# EAGLE board power (EAGLE 9.6.2)
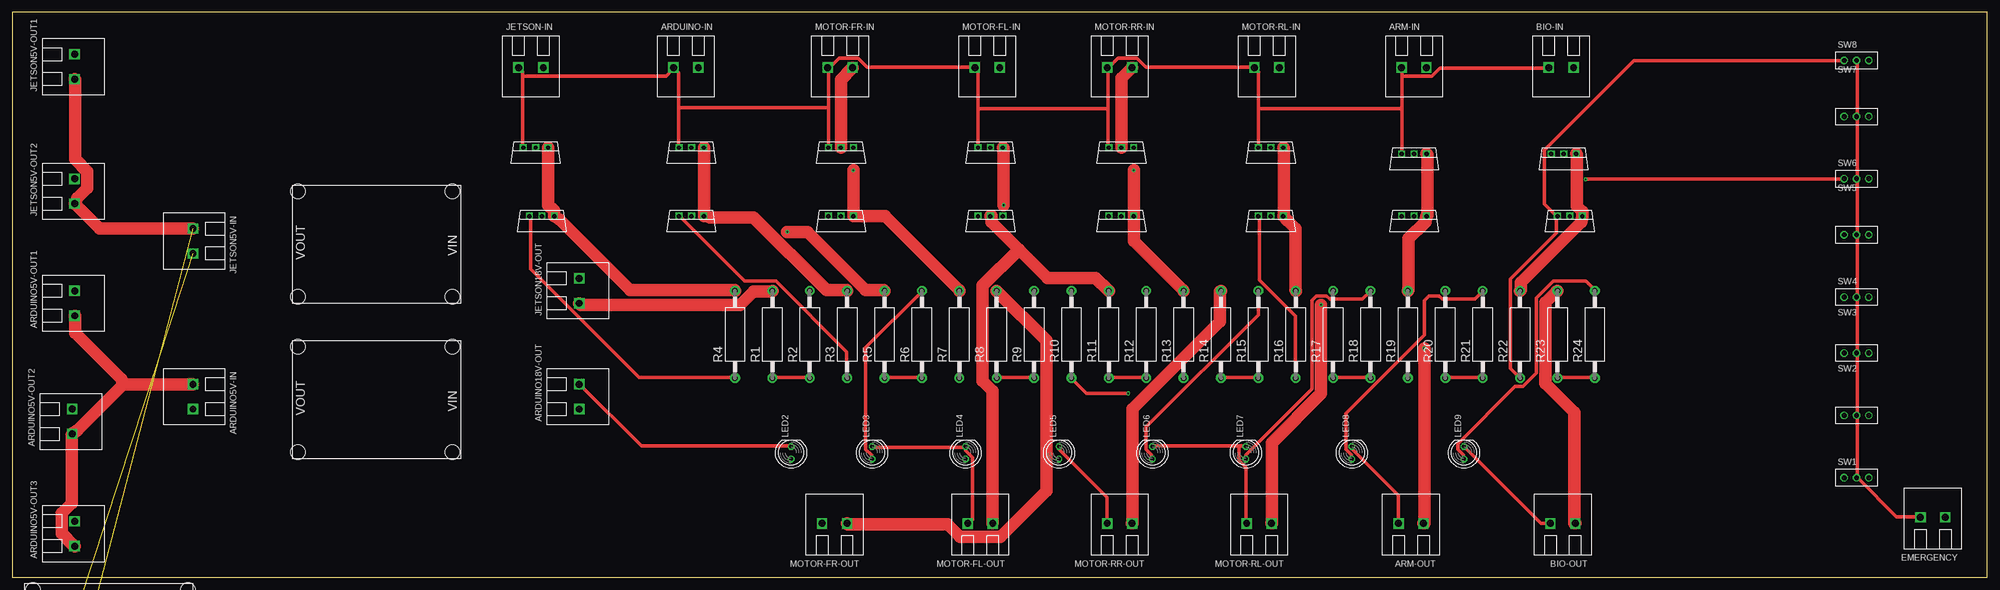
[diagram p0: board, top side]
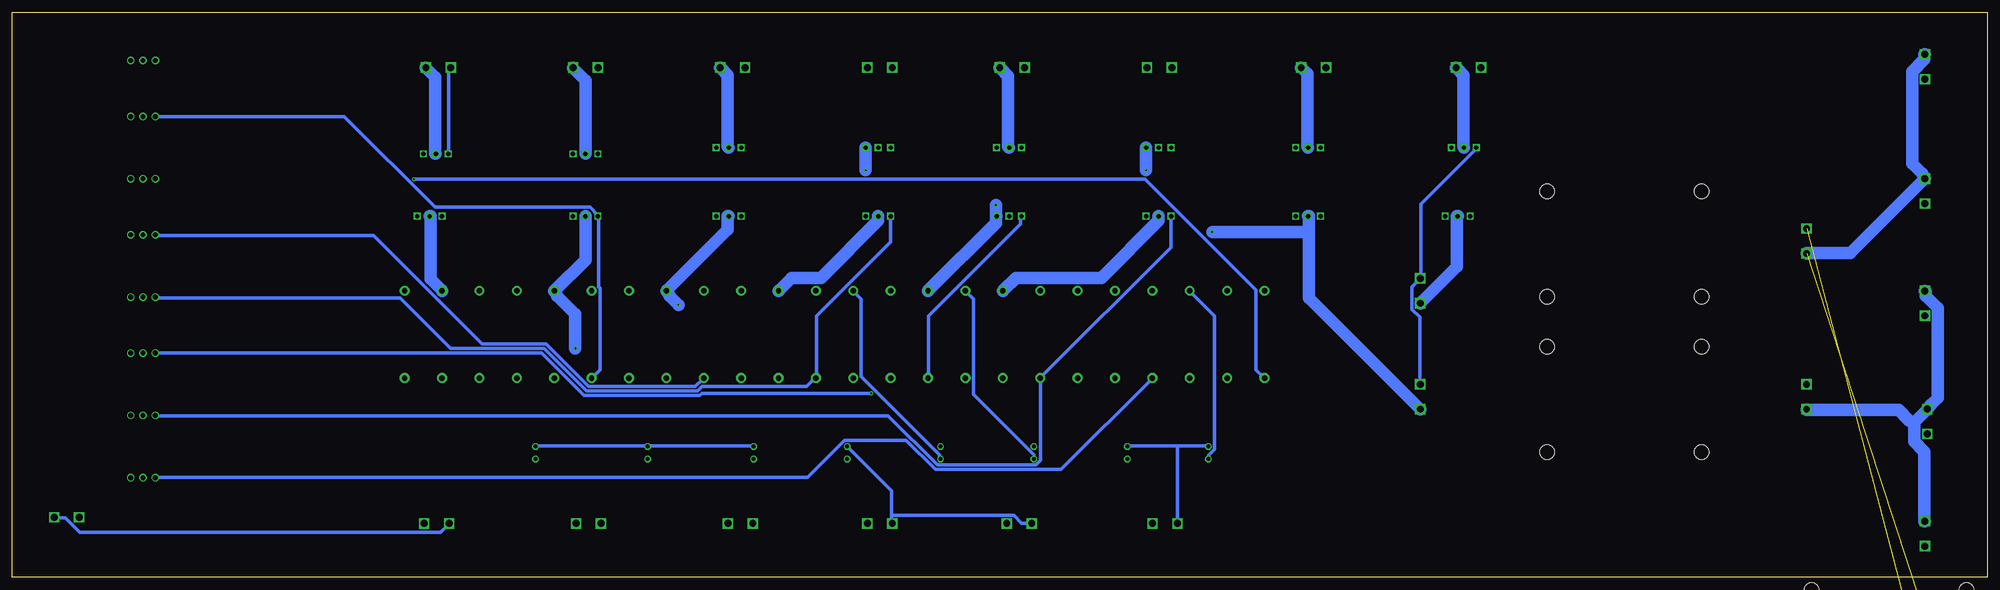
[diagram p1: board, bottom side, seen from below]

Size 402.57 x 115.24 mm. Coordinates in mm from the lower left corner, seen from the top.
Outline: 0,0 402.57,0 402.57,115.24 0,115.24 0,0
Copper layers (1*16): Top 0.035mm / dielectric 1.5mm / Bottom 0.035mm
Design rules "default *": minimum track width 0.1mm, minimum drill 0.35mm, track to track 6mil, track to pad 6mil, pad to pad 6mil, via to via 6mil, smd to smd 6mil, copper to edge 40mil, drill to drill 6mil, minimum pad ring 10mil, minimum via ring 8mil, stop-mask expansion 4mil, vias tented up to drill 0mil, thermal gap 10mil
Net classes: 0 default: width 0.762 mm; 1 power: width 2.54 mm, clearance 0.127 mm

## Footprints (pad centres in the part's own frame; a part is rotated, then mirrored left to right if it is on the bottom)
2PIN = drill 1.4 square: P$1 -2.54,0; P$2 2.54,0
LED5MM = drill 0.813 octagon: A -1.27,0; K 1.27,0
AC01 = drill 1.1 pad 2: 1 -8.9,0; 2 8.9,0
SRIDE_SWITCH = drill 1: L -2.5,0; LR 0,0; R 2.5,0
2SJ334 = drill 0.9 square: DRAIN 6.35,2.54; GATE 3.81,2.54; SOURCE 8.89,2.54
DCDCDEV = hole 3: 3,0; 3,21.5; 34.5,21.5; 34.5,0

## Placement (x,y rotation side)
ARDUINO5V-IN  [2PIN]  36.83,36.83 270 top
ARDUINO5V-OUT1  [2PIN]  12.7,55.88 90 top
ARDUINO5V-OUT2  [2PIN]  12.24,31.77 90 top
ARDUINO5V-OUT3  [2PIN]  12.7,8.89 90 top
ARDUINO18V-OUT  [2PIN]  115.57,36.83 90 top
ARDUINO-IN  [2PIN]  137.31,103.97 0 top
ARM-IN  [2PIN]  285.73,103.97 0 top
ARM-OUT  [2PIN]  285.11,10.97 180 top
BIO-IN  [2PIN]  315.73,103.97 0 top
BIO-OUT  [2PIN]  316.07,10.97 180 top
EMERGENCY  [2PIN]  391.48,12.24 180 top
JETSON5V-IN  [2PIN]  36.83,68.58 270 top
JETSON5V-IN1  [2PIN]  6.35,-35.56 0 top  (outside the outline)
JETSON5V-OUT1  [2PIN]  12.7,104.14 90 top
JETSON5V-OUT2  [2PIN]  12.7,78.74 90 top
JETSON18V-OUT  [2PIN]  115.57,58.42 90 top
JETSON-IN  [2PIN]  105.73,103.97 0 top
LED2  [LED5MM]  158.75,25.4 90 top
LED3  [LED5MM]  175.26,25.4 90 top
LED4  [LED5MM]  194.31,25.4 90 top
LED5  [LED5MM]  213.36,25.4 90 top
LED6  [LED5MM]  232.41,25.4 90 top
LED7  [LED5MM]  251.46,25.4 90 top
LED8  [LED5MM]  273.05,25.4 90 top
LED9  [LED5MM]  295.91,25.4 90 top
MOTOR-FL-IN  [2PIN]  198.75,103.97 0 top
MOTOR-FL-OUT  [2PIN]  197.31,10.97 180 top
MOTOR-FR-IN  [2PIN]  168.75,103.97 0 top
MOTOR-FR-OUT  [2PIN]  167.62,10.97 180 top
MOTOR-RL-IN  [2PIN]  255.73,103.97 0 top
MOTOR-RL-OUT  [2PIN]  254.15,10.97 180 top
MOTOR-RR-IN  [2PIN]  225.73,103.97 0 top
MOTOR-RR-OUT  [2PIN]  225.73,10.97 180 top
R1  [AC01]  154.94,49.53 90 top
R2  [AC01]  162.56,49.53 90 top
R3  [AC01]  170.18,49.53 90 top
R4  [AC01]  147.32,49.53 90 top
R5  [AC01]  177.8,49.53 90 top
R6  [AC01]  185.42,49.53 90 top
R7  [AC01]  193.04,49.53 90 top
R8  [AC01]  200.66,49.53 90 top
R9  [AC01]  208.28,49.53 90 top
R10  [AC01]  215.9,49.53 90 top
R11  [AC01]  223.52,49.53 90 top
R12  [AC01]  231.14,49.53 90 top
R13  [AC01]  238.76,49.53 90 top
R14  [AC01]  246.38,49.53 90 top
R15  [AC01]  254,49.53 90 top
R16  [AC01]  261.62,49.53 90 top
R17  [AC01]  269.24,49.53 90 top
R18  [AC01]  276.86,49.53 90 top
R19  [AC01]  284.48,49.53 90 top
R20  [AC01]  292.1,49.53 90 top
R21  [AC01]  299.72,49.53 90 top
R22  [AC01]  307.34,49.53 90 top
R23  [AC01]  314.96,49.53 90 top
R24  [AC01]  322.58,49.53 90 top
SW1  SRIDE_SWITCH  [SRIDE_SWITCH]  375.92,20.32 0 top
SW2  SRIDE_SWITCH  [SRIDE_SWITCH]  375.92,33.02 0 top
SW3  SRIDE_SWITCH  [SRIDE_SWITCH]  375.92,45.72 0 top
SW4  SRIDE_SWITCH  [SRIDE_SWITCH]  375.92,57.15 0 top
SW5  SRIDE_SWITCH  [SRIDE_SWITCH]  375.92,69.85 0 top
SW6  SRIDE_SWITCH  [SRIDE_SWITCH]  375.92,81.28 0 top
SW7  SRIDE_SWITCH  [SRIDE_SWITCH]  375.92,93.98 0 top
SW8  SRIDE_SWITCH  [SRIDE_SWITCH]  375.92,105.41 0 top
U$1  2SJ334  [2SJ334]  132.08,85.09 0 top
U$2  DCDCDEV  [DCDCDEV]  92.71,78.74 180 top
U$3  2SJ334  [2SJ334]  100.33,85.09 0 top
U$4  2SJ334  [2SJ334]  101.6,71.12 0 top
U$5  2SJ334  [2SJ334]  132.08,71.12 0 top
U$6  DCDCDEV  [DCDCDEV]  1.27,-24.13 0 top
U$7  2SJ334  [2SJ334]  162.56,85.09 0 top
U$8  2SJ334  [2SJ334]  162.56,71.12 0 top
U$10  2SJ334  [2SJ334]  193.04,85.09 0 top
U$11  2SJ334  [2SJ334]  193.04,71.12 0 top
U$13  2SJ334  [2SJ334]  219.71,85.09 0 top
U$14  2SJ334  [2SJ334]  219.71,71.12 0 top
U$16  2SJ334  [2SJ334]  250.19,85.09 0 top
U$17  2SJ334  [2SJ334]  250.19,71.12 0 top
U$20  2SJ334  [2SJ334]  279.4,83.82 0 top
U$21  2SJ334  [2SJ334]  279.4,71.12 0 top
U$23  DCDCDEV  [DCDCDEV]  92.71,46.99 180 top
U$24  2SJ334  [2SJ334]  309.88,83.82 0 top
U$25  2SJ334  [2SJ334]  311.15,71.12 0 top

## Library data of the parts
ARDUINO5V-IN ARDUINO5V-OUT1-ARDUINO5V-OUT3 ARDUINO18V-OUT ARDUINO-IN ARM-IN ARM-OUT BIO-IN BIO-OUT EMERGENCY JETSON5V-IN JETSON5V-IN1 JETSON5V-OUT1 JETSON5V-OUT2 JETSON18V-OUT JETSON-IN MOTOR-FL-IN MOTOR-FL-OUT MOTOR-FR-IN MOTOR-FR-OUT MOTOR-RL-IN MOTOR-RL-OUT MOTOR-RR-IN MOTOR-RR-OUT = TB113-2B-x-x-0-x-x
LED2-LED9 = led
R1-R24 = resistor-power; OC_FARNELL: unknown; OC_NEWARK: unknown
SW1-SW8 = Sride Switch
U$1 U$3-U$5 U$7 U$8 U$10 U$11 U$13 U$14 U$16 U$17 U$20 U$21 U$24 U$25 = 2SJ334
U$2 U$6 U$23 = dcdcDEVkit

## Nets
18V [power]: JETSON-IN.P$2 U$3.DRAIN
IN: ARDUINO18V-OUT.P$2 ARDUINO-IN.P$1 ARM-IN.P$1 ARM-OUT.P$2 BIO-IN.P$1 BIO-OUT.P$2 EMERGENCY.P$1 JETSON18V-OUT.P$2 JETSON-IN.P$1 LED2.K LED3.K LED4.K LED5.K LED6.K LED7.K LED8.K LED9.K MOTOR-FL-IN.P$1 MOTOR-FL-OUT.P$2 MOTOR-FR-IN.P$1 MOTOR-FR-OUT.P$2 MOTOR-RL-IN.P$1 MOTOR-RL-OUT.P$2 MOTOR-RR-IN.P$1 MOTOR-RR-OUT.P$2 U$1.GATE U$3.GATE U$7.GATE U$10.GATE U$13.GATE U$16.GATE U$20.GATE U$24.GATE
MA [power]: R4.2 U$3.SOURCE U$4.SOURCE
MAC [power]: JETSON18V-OUT.P$1 R1.2 U$4.DRAIN
MAD [power]: JETSON5V-IN1.P$2 JETSON5V-IN.P$1 JETSON5V-OUT1.P$1 JETSON5V-OUT2.P$1
MBB [power]: ARDUINO-IN.P$2 U$1.DRAIN
MBV [power]: R13.2 U$13.SOURCE U$14.SOURCE
MCX [power]: R16.2 U$16.SOURCE U$17.SOURCE
MDSDS [power]: BIO-IN.P$2 U$24.DRAIN
MGG [power]: ARM-IN.P$2 U$20.DRAIN
MH [power]: R10.2 U$10.SOURCE U$11.SOURCE
MHGF [power]: ARM-OUT.P$1 R20.2 U$21.DRAIN
MHH [power]: MOTOR-RR-OUT.P$1 R14.2 U$14.DRAIN
MHHHH [power]: BIO-OUT.P$1 R23.2 U$25.DRAIN
MJUY [power]: R22.2 U$24.SOURCE U$25.SOURCE
MKK [power]: R3.2 U$1.SOURCE U$5.SOURCE
ML [power]: ARDUINO5V-IN.P$1 ARDUINO5V-OUT1.P$1 ARDUINO5V-OUT2.P$1 ARDUINO5V-OUT3.P$1
MN [power]: MOTOR-RL-IN.P$2 U$16.DRAIN
MOO [power]: ARDUINO18V-OUT.P$1 R5.2 U$5.DRAIN
MS [power]: R7.2 U$7.SOURCE U$8.SOURCE
MU [power]: MOTOR-FR-IN.P$2 U$7.DRAIN
MV [power]: MOTOR-FL-OUT.P$1 R11.2 U$11.DRAIN
MVVV [power]: R19.2 U$20.SOURCE U$21.SOURCE
MX [power]: MOTOR-RR-IN.P$2 U$13.DRAIN
MY [power]: MOTOR-FL-IN.P$2 U$10.DRAIN
MZZ [power]: MOTOR-RL-OUT.P$1 R17.2 U$17.DRAIN
N$1: R3.1 SW1.L U$5.GATE
N$2: LED2.A R2.2
N$3: LED3.A R6.2
N$4: LED4.A R9.2
N$6: R5.1 R6.1
N$7: LED5.A R12.2
N$8: R22.1 SW8.L U$25.GATE
N$9 [power]: ARDUINO5V-IN.P$2 ARDUINO5V-OUT1.P$2 ARDUINO5V-OUT2.P$2 ARDUINO5V-OUT3.P$2
N$10: R7.1 SW2.L U$8.GATE
N$11: LED6.A R15.2
N$12: LED7.A R18.2
N$13 [power]: MOTOR-FR-OUT.P$1 R8.2 U$8.DRAIN
N$15: R8.1 R9.1
N$16: LED8.A R21.2
N$17: LED9.A R24.2
N$18 [power]: JETSON5V-IN1.P$1 JETSON5V-IN.P$2 JETSON5V-OUT1.P$2 JETSON5V-OUT2.P$2
N$19: R10.1 SW3.L U$11.GATE
N$24: R11.1 R12.1
N$28: R13.1 SW4.L U$14.GATE
N$33: R14.1 R15.1
N$37: R16.1 SW5.L U$17.GATE
N$42: R17.1 R18.1
N$43: R4.1 SW6.L U$4.GATE
N$49: R1.1 R2.1
N$52: R19.1 SW7.L U$21.GATE
N$58: R23.1 R24.1
N$60: R20.1 R21.1
OUT: EMERGENCY.P$2 SW1.LR SW2.LR SW3.LR SW4.LR SW5.LR SW6.LR SW7.LR SW8.LR

## Tracks (layer width: path | path; a pad name or v marks a point on that pad's centre or on a via)
18V
  Bottom 2.54: U$3.DRAIN 106.76,87.81 106.76,102.44 108.13,103.81 JETSON-IN.P$2
IN
  Top 0.762: MOTOR-FL-OUT.P$2 195,11 195.68,11.68 195.68,24.49 194.31,25.86 LED4.K 194.08,26.54 175.34,26.54 LED3.K | LED5.K 213.51,26.54 213.51,25.86 223.11,16.26 223.11,11 MOTOR-RR-OUT.P$2 | 250.09,26.77 251.46,26.77 LED7.K | 250.09,26.77 232.49,26.77 LED6.K | 250.09,26.77 250.09,23.8 251.46,22.43 251.46,11 MOTOR-RL-OUT.P$2 | LED8.K 273.18,26.54 273.18,26.09 282.55,16.71 282.55,11 ARM-OUT.P$2 | LED9.K 311.58,11 313.41,11 BIO-OUT.P$2 | 253.98,95.58 253.98,103.12 253.29,103.81 MOTOR-RL-IN.P$1 252.83,104.04 231.12,104.04 229.29,105.87 225.4,105.87 223.57,104.04 MOTOR-RR-IN.P$1 223.34,103.81 223.34,95.58 | 253.98,95.58 253.98,87.81 U$16.GATE | 283.24,102.21 283.24,103.81 ARM-IN.P$1 | 283.24,102.21 283.24,95.58 | 283.24,95.58 283.24,86.44 U$20.GATE | 283.24,95.58 253.98,95.58 | 283.24,102.21 289.41,102.21 291.01,103.81 313.18,103.81 BIO-IN.P$1 | 196.82,95.58 196.82,103.35 196.37,103.81 MOTOR-FL-IN.P$1 195.91,104.04 174.19,104.04 172.36,105.87 168.48,105.87 166.65,104.04 MOTOR-FR-IN.P$1 166.42,103.81 166.42,95.81 | 196.82,95.58 196.82,87.81 U$10.GATE | 223.34,95.58 223.34,87.81 U$13.GATE | 223.34,95.58 196.82,95.58 | 166.42,95.81 166.42,87.81 U$7.GATE | 104.01,102.21 104.01,103.12 103.33,103.81 JETSON-IN.P$1 | 104.01,102.21 104.01,87.81 U$3.GATE | 135.79,95.81 135.79,102.89 134.87,103.81 ARDUINO-IN.P$1 134.65,103.58 133.27,102.21 104.01,102.21 | 135.79,95.81 135.79,87.81 U$1.GATE | 135.79,95.81 166.42,95.81 | LED2.K 158.65,26.77 128.25,26.77 115.67,39.34 ARDUINO18V-OUT.P$2
  Bottom 0.762: 165.05,26.77 175.11,26.77 LED3.K | 165.05,26.77 158.88,26.77 LED2.K | 165.05,26.77 165.05,11 MOTOR-FR-OUT.P$2 | 223.34,12.6 223.34,17.63 232.26,26.54 LED6.K | 223.34,12.6 223.34,11 MOTOR-RR-OUT.P$2 | 223.34,12.6 198.43,12.6 196.82,11 195,11 MOTOR-FL-OUT.P$2 | LED9.K 295.81,26.77 273.18,26.77 LED8.K 272.72,26.77 251.46,26.77 LED7.K | EMERGENCY.P$1 393.88,12.14 391.82,12.14 388.85,9.17 315.24,9.17 313.64,10.77 BIO-OUT.P$2 | U$24.GATE 313.64,86.44 313.64,103.58 313.41,103.81 BIO-IN.P$1 | ARDUINO18V-OUT.P$2 115.67,39.57 115.67,53.06 117.27,54.66 117.27,59.23 115.67,60.83 JETSON18V-OUT.P$2 115.44,61.29 115.44,76.15 104.01,87.58 U$3.GATE
MA
  Top 2.54: U$3.SOURCE 109.27,87.58 109.27,75.92 110.41,74.78 110.41,73.86 U$4.SOURCE 111.56,72.95 125.96,58.55 147.22,58.55 R4.2
MAC
  Top 2.54: R1.2 154.76,58.32 151.11,58.32 148.36,55.57 115.9,55.57 115.67,55.8 JETSON18V-OUT.P$1
  Bottom 2.54: U$4.DRAIN 108.13,73.64 108.13,63.35 115.44,56.03 JETSON18V-OUT.P$1
MAD  (1 unrouted)
  Top 2.54: JETSON5V-IN.P$1 17.83,71.12 12.8,76.15 | 12.8,76.15 JETSON5V-OUT2.P$1 | JETSON5V-OUT1.P$1 12.8,101.52 12.8,85.29 15.32,82.78 15.32,79.35 13.26,77.29 12.8,76.15
MBB
  Bottom 2.54: U$1.DRAIN 138.53,87.81 138.53,102.67 139.68,103.81 ARDUINO-IN.P$2
MBV  (via drill 0.35)
  Top 2.54: R13.2 238.66,58.55 228.6,68.61 228.6,73.64 U$14.SOURCE v228.6,83.01
  Bottom 2.54: v228.6,83.01 U$13.SOURCE
MCX
  Top 2.54: U$16.SOURCE 259.23,87.58 259.23,73.86 U$17.SOURCE 259.92,72.72 261.52,71.12 261.52,58.55 R16.2
MDSDS
  Bottom 2.54: U$24.DRAIN 316.38,86.44 316.38,101.98 318.21,103.81 BIO-IN.P$2
MGG
  Bottom 2.54: U$20.DRAIN 285.75,101.3 288.26,103.81 ARM-IN.P$2
MH  (via drill 0.35)
  Top 2.54: v202.08,75.92 202.08,87.58 U$10.SOURCE
  Bottom 2.54: 202.08,73.64 202.08,72.26 215.8,58.55 R10.2 | 202.08,73.64 U$11.SOURCE | v202.08,75.92 202.08,73.64
MHGF  (via drill 0.35)
  Top 2.54: v287.81,46.66 287.81,11 ARM-OUT.P$1
  Bottom 2.54: U$21.DRAIN 285.75,64.72 291.92,58.55 | 291.92,58.55 R20.2 | v287.81,46.66 287.81,53.75 291.47,57.4 291.92,58.55
MHH
  Top 2.54: MOTOR-RR-OUT.P$1 228.37,11 228.37,34.31 246.2,52.15 246.2,58.32 R14.2
  Bottom 2.54: U$14.DRAIN 226.09,73.64 226.09,72.72 237.74,61.06 243.69,61.06 246.2,58.55 R14.2
MHHHH
  Top 2.54: BIO-OUT.P$1 318.44,11 318.44,33.63 312.5,39.57 312.5,56.03 314.78,58.32 R23.2
  Bottom 2.54: U$25.DRAIN 317.3,73.64 317.3,60.83 315.01,58.55 R23.2
MJUY
  Top 2.54: U$24.SOURCE 318.9,86.21 318.9,75.69 320.04,74.55 U$25.SOURCE 319.81,72.49 307.47,60.15 307.47,58.55 R22.2
MKK
  Top 2.54: 141.05,73.86 141.05,87.58 U$1.SOURCE | 141.05,73.86 U$5.SOURCE | R3.2 170.08,58.55 165.96,58.55 151.11,73.41 142.19,73.41 141.05,73.86
ML
  Top 2.54: ARDUINO5V-OUT3.P$1 12.57,6.43 10.06,8.94 10.06,13.06 12.12,15.11 12.12,29.06 ARDUINO5V-OUT2.P$1 13.26,29.97 22.63,39.34 | 22.63,39.34 36.81,39.34 ARDUINO5V-IN.P$1 | ARDUINO5V-OUT1.P$1 12.8,53.29 12.8,49.86 22.17,40.49 22.63,39.34
MN
  Bottom 2.54: U$16.DRAIN 256.72,87.81 256.72,102.44 258.09,103.81 MOTOR-RL-IN.P$2
MOO  (via drill 0.35)
  Top 2.54: v157.96,70.43 162.08,70.43 173.97,58.55 177.62,58.55 R5.2
  Bottom 2.54: 138.3,70.43 138.3,56.95 115.67,34.31 ARDUINO18V-OUT.P$1 | 138.3,70.43 138.3,73.64 U$5.DRAIN | 138.3,70.43 v157.96,70.43
MS  (via drill 0.35)
  Top 2.54: R7.2 192.94,58.55 177.85,73.64 171.45,73.64 U$8.SOURCE v171.45,83.01
  Bottom 2.54: v171.45,83.01 U$7.SOURCE
MU
  Top 2.54: U$7.DRAIN 168.94,87.81 168.94,101.52 171.22,103.81 MOTOR-FR-IN.P$2
MV
  Top 2.54: 205.17,66.89 211,61.06 220.83,61.06 223.34,58.55 R11.2 | 205.17,66.89 199.57,72.49 199.57,73.64 U$11.DRAIN | 205.17,66.89 197.74,59.46 197.74,40.03 199.8,37.97 199.8,11 MOTOR-FL-OUT.P$1
MVVV
  Top 2.54: U$20.SOURCE 288.49,86.21 288.49,73.86 U$21.SOURCE 288.04,72.49 284.61,69.06 284.61,58.55 R19.2
MX
  Top 2.54: U$13.DRAIN 226.09,87.81 226.09,101.75 228.14,103.81 MOTOR-RR-IN.P$2
MY
  Bottom 2.54: U$10.DRAIN 199.57,87.81 199.57,102.21 201.17,103.81 MOTOR-FL-IN.P$2
MZZ  (via drill 0.35)
  Top 2.54: v266.78,55.57 266.78,37.52 256.72,27.46 256.72,11 MOTOR-RL-OUT.P$1
  Bottom 2.54: 269.06,58.55 256.72,70.89 256.72,73.64 U$17.DRAIN | 269.06,58.55 R17.2 | v266.78,55.57 268.61,57.4 269.06,58.55
N$1
  Top 0.762: U$5.GATE 136.02,73.64 149.28,60.38 155.68,60.38 170.08,45.97 170.08,40.72 R3.1
  Bottom 0.762: SW1.L 373.3,20.37 240.49,20.37 232.94,27.91 220.37,27.91 214.43,21.97 188.82,21.97 170.31,40.49 R3.1
N$2
  Bottom 0.762: LED2.A 158.65,24.26 158.65,24.94 157.5,26.09 157.5,53.29 162.53,58.32 R2.2
N$3
  Top 0.762: LED3.A 175.11,24.26 175.11,24.94 173.97,26.09 173.97,46.89 185.4,58.32 R6.2
N$4
  Bottom 0.762: LED4.A 194.31,24.94 206.65,37.29 206.65,56.72 208.25,58.32 R9.2
N$6
  Top 0.762: R5.1 177.85,40.72 185.4,40.72 R6.1
N$7
  Bottom 0.762: LED5.A 213.51,24.26 213.51,24.94 229.51,40.95 229.51,56.72 231.12,58.32 R12.2
N$8
  Top 0.762: R22.1 307.24,40.72 305.41,42.55 305.41,60.83 314.78,70.21 314.78,73.64 U$25.GATE 314.55,73.86 312.27,76.15 312.27,87.12 330.56,105.41 SW8.L
N$9
  Bottom 2.54: 14.86,31.57 14.86,27.69 12.8,25.63 12.8,11.46 ARDUINO5V-OUT3.P$2 | 14.86,31.57 12.34,34.09 ARDUINO5V-OUT2.P$2 11.43,35.23 10.06,36.6 10.06,54.89 12.57,57.4 12.57,58.32 ARDUINO5V-OUT1.P$2 | ARDUINO5V-IN.P$2 36.81,34.09 18.06,34.09 16,32.03 14.86,31.57
N$10
  Bottom 0.762: U$8.GATE 166.42,73.64 166.42,67.23 192.94,40.72 R7.1 192.94,40.26 192.94,23.8 193.85,22.88 213.97,22.88 224.03,32.94 373.3,32.94 SW2.L
N$11
  Top 0.762: LED6.A 232.26,24.26 232.26,24.94 231.12,26.09 231.12,30.66 253.98,53.52 253.98,58.32 R15.2
N$12
  Top 0.762: LED7.A 251.46,24.94 264.95,38.43 264.95,56.49 265.86,57.4 267.92,57.4 268.61,56.72 275.23,56.72 276.83,58.32 R18.2
N$13
  Top 2.54: MOTOR-FR-OUT.P$1 170.31,10.77 190.65,10.77 193.17,8.26 201.4,8.26 210.77,17.63 210.77,48.26 200.71,58.32 R8.2
  Bottom 2.54: U$8.DRAIN 168.94,73.64 168.94,72.72 180.59,61.06 197.97,61.06 200.48,58.55 R8.2
N$15
  Top 0.762: R8.1 200.71,40.72 208.25,40.72 R9.1
N$16
  Top 0.762: LED8.A 272.95,24.26 272.95,24.94 271.81,26.09 271.81,33.4 287.81,49.4 287.81,56.49 288.72,57.4 290.78,57.4 291.47,56.72 298.09,56.72 299.69,58.32 R21.2
N$17
  Top 0.762: LED9.A 295.81,24.26 295.81,24.94 294.67,26.09 294.67,27.23 306.32,38.89 307.92,38.89 310.67,41.63 310.67,56.95 314.1,60.38 320.73,60.38 322.56,58.55 R24.2
N$18  (1 unrouted)
  Bottom 2.54: JETSON5V-IN.P$2 36.81,66.09 27.89,66.09 JETSON5V-OUT2.P$2 13.26,82.32 15.32,84.38 15.32,103.12 12.8,105.64 12.8,106.55 JETSON5V-OUT1.P$2
N$19  (via drill 0.35)
  Top 0.762: v227.46,37.52 219,37.52 216.03,40.49 R10.1
  Bottom 0.762: U$11.GATE 197.05,73.64 197.05,72.03 215.8,53.29 215.8,40.72 R10.1 | v227.46,37.52 261.98,37.52 262.43,37.06 285.98,37.06 294.67,45.74 373.3,45.74 SW3.L
N$24
  Top 0.762: R11.1 223.57,40.72 231.12,40.72 R12.1
N$28
  Bottom 0.762: U$14.GATE 223.57,73.64 223.57,68.38 238.66,53.29 238.66,40.72 R13.1 239.12,40.49 240.72,38.89 261.98,38.89 262.89,37.97 285.52,37.97 294.21,46.66 313.18,46.66 323.47,56.95 373.3,56.95 SW4.L
N$33
  Top 0.762: R14.1 246.43,40.72 253.98,40.72 R15.1
N$37
  Top 0.762: U$17.GATE 254.2,73.64 254.2,60.6 261.52,53.29 261.52,40.72 R16.1
  Bottom 0.762: SW5.L 373.3,69.75 328.95,69.75 306.78,47.57 293.75,47.57 285.06,38.89 263.35,38.89 261.75,40.49 R16.1
N$42
  Top 0.762: R17.1 269.29,40.72 276.83,40.72 R18.1
N$43  (via drill 0.35)
  Top 0.762: U$4.GATE 105.61,73.64 105.61,62.89 127.79,40.72 147.22,40.72 R4.1 | v320.73,81.18 373.3,81.18 SW6.L
  Bottom 0.762: v320.73,81.18 171.68,81.18 149.05,58.55 149.05,42.32 147.45,40.72 R4.1
N$49
  Top 0.762: R1.1 154.99,40.72 162.53,40.72 R2.1
N$52
  Bottom 0.762: R19.1 284.38,40.72 282.78,42.32 282.78,59 283.01,59.23 283.01,73.64 U$21.GATE 283.24,73.86 284.84,75.46 316.38,75.46 334.9,93.98 SW7.L
N$58
  Top 0.762: R23.1 315.01,40.72 322.56,40.72 R24.1
N$60
  Top 0.762: R20.1 292.15,40.72 299.69,40.72 R21.1
OUT
  Top 0.762: EMERGENCY.P$2 388.85,12.37 384.05,12.37 376.28,20.14 SW1.LR 376.05,20.37 376.05,32.94 SW2.LR 376.05,33.17 376.05,45.52 SW3.LR 376.05,45.74 376.05,56.95 SW4.LR 376.05,57.4 376.05,69.52 SW5.LR 376.05,69.98 376.05,81.18 SW6.LR 376.05,81.64 376.05,93.75 SW7.LR 376.05,93.98 376.05,105.41 SW8.LR